# Altium PCB Processor Board.PcbDoc
Units mm, origin at the board's own origin, x right, y up, seen from the top; angles counter-clockwise.
Board outline 69.72 x 95.88 mm, 2 copper layers (Top Layer, Bottom Layer); 46 components, 39 nets, 179 pads, 1 vias.
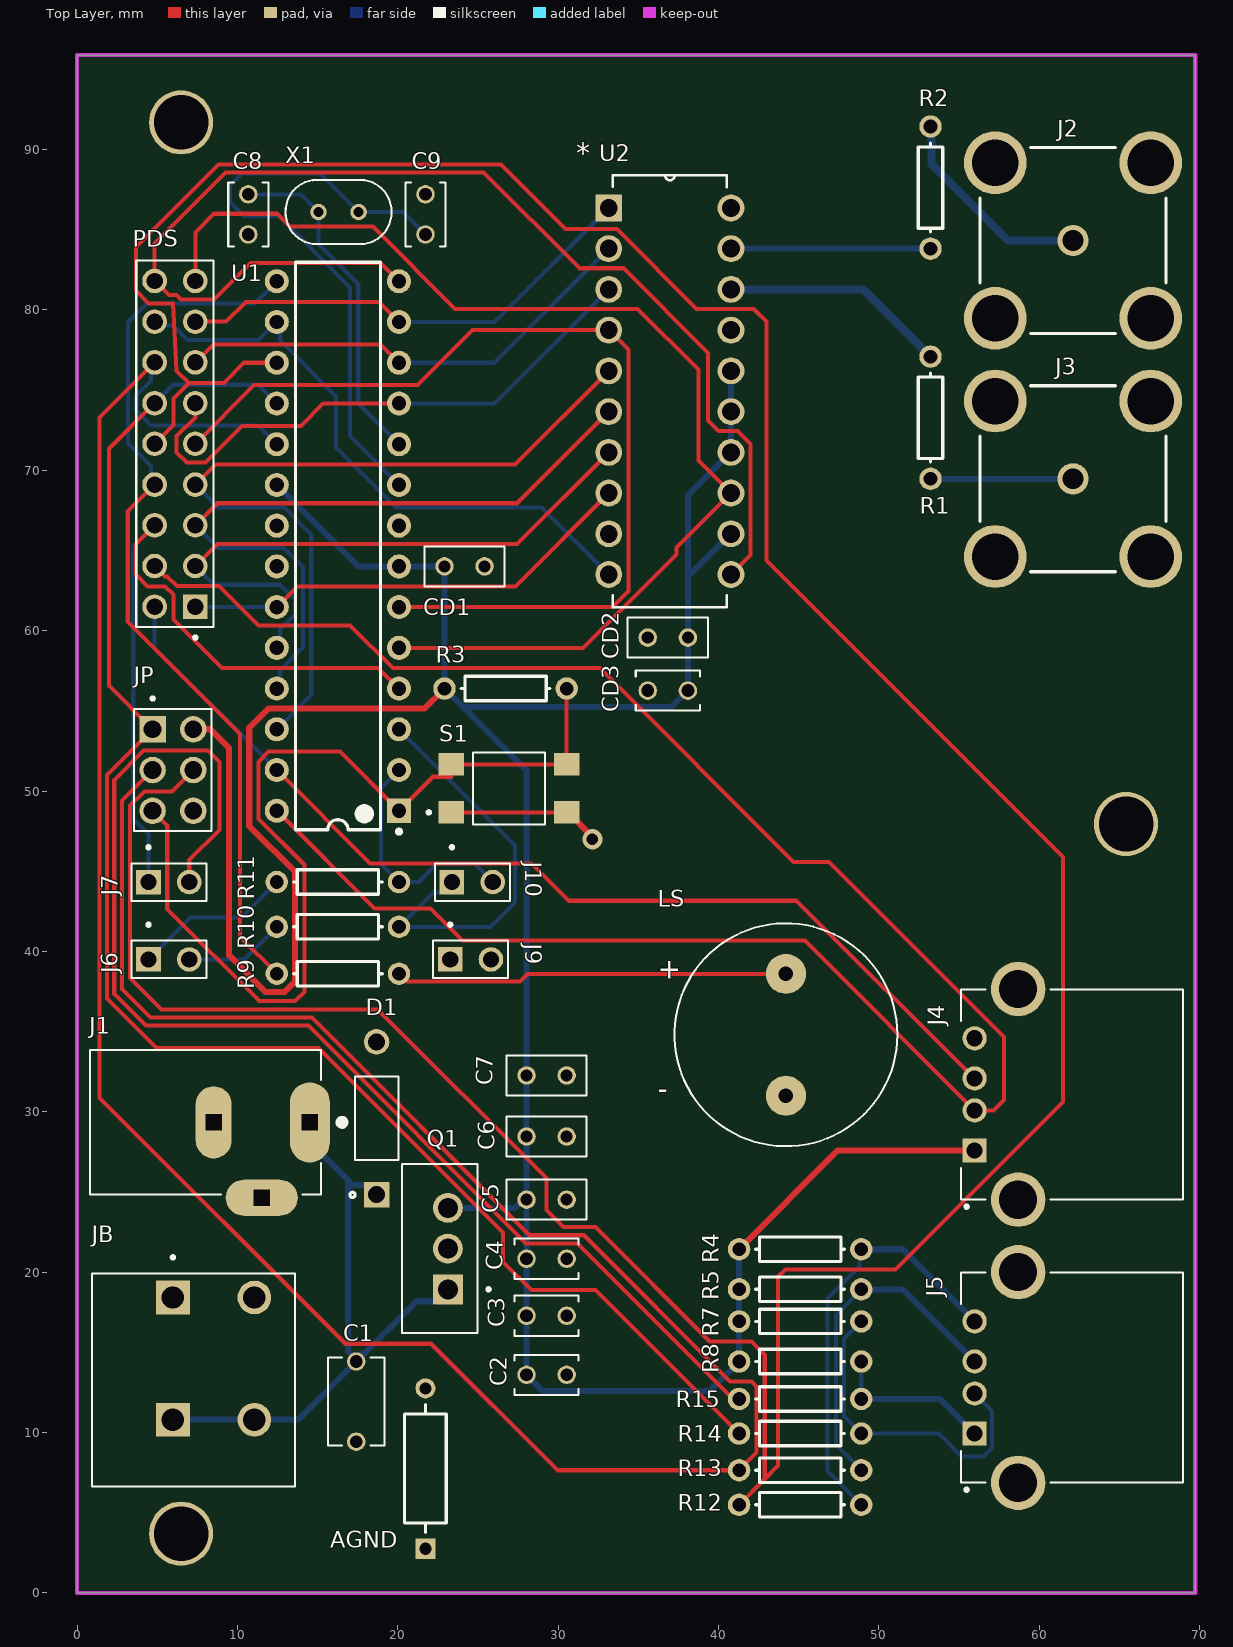
[diagram p0: Top Layer view]
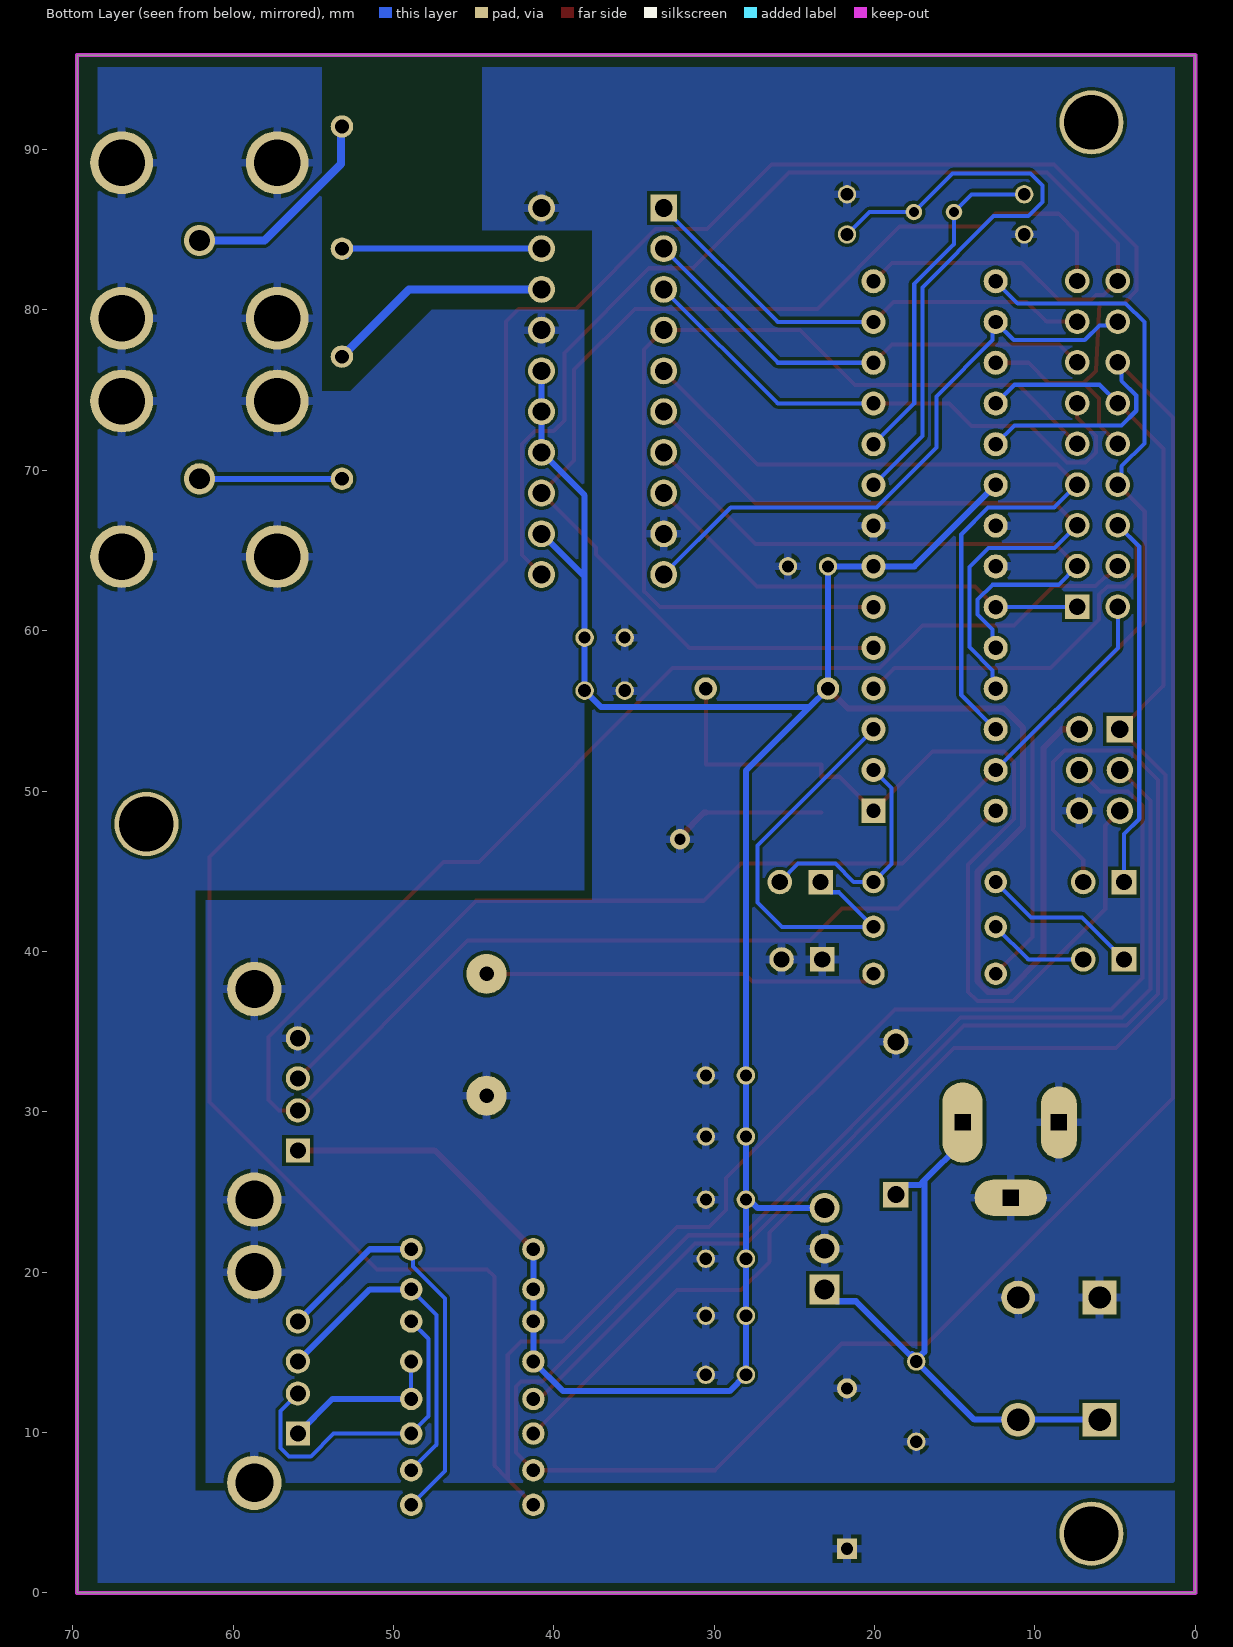
[diagram p1: Bottom Layer view, seen from below]

## Layer stack, top to bottom
Top Solder: solder mask 0.0102, Solder Resist, Dk 3.5
Top Layer: signal copper 0.0356
Dielectric 1: dielectric 0.32, FR-4, Dk 4.8
Bottom Layer: signal copper 0.0356
Bottom Solder: solder mask 0.0102, Solder Resist, Dk 3.5

## Board outline
0,0 69.723,0 69.723,95.885 0,95.885

## Design rules (kind name [scope] priority, off if disabled: settings)
BoardOutlineClearance [All] p1: gap=0.2 ignorepadtopadclearanceinfootprint=FALSE except(0.4: Arc-SplitBarrior Arc-SplitContinuation Track-SplitBarrior Track-SplitContinuation SMDPad-SplitBarrior SMDPad-SplitContinuation THPad-SplitBarrior THPad-SplitContinuation Via-SplitBarrior Via-SplitContinuation Fill-SplitBarrior Fill-SplitContinuation Poly-SplitBarrior Poly-SplitContinuation Region-SplitBarrior Region-SplitContinuation Text-SplitBarrior Text-SplitContinuation)
Clearance "Clearance Bottom Layer" [OnLayer('Bottom Layer')] p1: gap=0.203 ignorepadtopadclearanceinfootprint=TRUE except(0.254: Arc-Text Track-Text SMDPad-Text THPad-Text Via-Text Fill-Text Poly-Text Region-Text Text-Text)
Clearance "Clearance Top Layer" [OnLayer('Top Layer')] p2: gap=0.203 ignorepadtopadclearanceinfootprint=TRUE except(0.254: Arc-Text Track-Text SMDPad-Text THPad-Text Via-Text Fill-Text Poly-Text Region-Text Text-Text)
Clearance [All] p3: gap=0.2 ignorepadtopadclearanceinfootprint=FALSE except(0.089: Arc-Arc Arc-Track Arc-SMDPad Track-Track Track-SMDPad SMDPad-SMDPad; 0.127: Arc-Via Track-Via SMDPad-Via THPad-Via Via-Via; 0.254: Arc-Text Track-Text SMDPad-Text THPad-Text Via-Text Fill-Text Poly-Text Region-Text Text-Text)
HoleSize [All] p1: absolutevalues=TRUE maxlimit=6.3 minlimit=0.2 maxpercent=80.000 minpercent=20.000
MinimumAnnularRing [All] p1: minimumring=0.076
MinimumSolderMaskSliver [All] p1: minsoldermaskwidth=0.1
PolygonConnect PolygonConnect_1 [All] p1: thpad.connectstyle=Relief thpad.reliefconductorwidth=0.508 thpad.reliefentries=4 thpad.polygonreliefangle="90 Angle" thpad.airgapwidth=0.254 smdpad.connectstyle=Relief smdpad.reliefconductorwidth=0.508 smdpad.reliefentries=4 smdpad.polygonreliefangle="90 Angle" smdpad.airgapwidth=0.254 via.connectstyle=Direct via.reliefconductorwidth=0.508 via.reliefentries=4 via.polygonreliefangle="90 Angle" via.airgapwidth=0.254
RoutingCorners [All] p1: cornerstyle=Round minsetback=2.54 maxsetback=2.54
RoutingVias [All] p1: holewidth=0.5 width=1 viastyle="Through Hole" minholewidth=0.2 minwidth=0.45 maxholewidth=1 maxwidth=2
SilkToSilkClearance [All] p1: silktosilkclearance=0.1
SilkToSolderMaskClearance [IsPad] p1: minsilkscreentomaskgap=0.1 clearancetoexposedcopper=TRUE
SolderMaskExpansion [All] p1: expansion=0.102 istentingtop=FALSE
Width [All] p1: maxlimit=2.54 minlimit=0.089 preferedwidth=0.381
25 further rules are at their usual default settings.

## Components (designator, comment, footprint, x,y, rotation, side; value= is the part's Value field where it differs from the comment)
AGND "0 Ohm" FP-ZOR-25-R-52-0R-MFG 21.717,7.747 r90 top
C1 "10u" CAPRB500W50L550T350H600 17.399,11.923 r270 top
C2 "1u" CAPRB250W50L400T250H550 29.274,13.593 r0 top
C3 "1u" CAPRB250W50L400T250H550 29.274,17.276 r0 top
C4 "1u" CAPRB250W50L400T250H550 29.274,20.832 r0 top
C5 "0.1u" CAP_RDER71H104K0S1H03A 29.274,24.515 r0 top
C6 "0.1u" CAP_RDER71H104K0S1H03A 29.274,28.452 r0 top
C7 "0.1u" CAP_RDER71H104K0S1H03A 29.274,32.262 r0 top
C8 "22p" CAPRB250W50L400T250H550 10.668,85.959 r270 top
C9 "22p" CAPRB250W50L400T250H550 21.717,85.959 r90 top
CD1 "0.1u" CAP_RDER71H104K0S1H03A 24.154,64.008 r0 top
CD2 "0.1u" CAP_RDER71H104K0S1H03A 36.83,59.563 r180 top
CD3 "1u" CAPRB250W50L400T250H550 36.83,56.261 r180 top
D1 "1N4001-T" DIOAD953W69L521D272 18.669,29.591 r90 top
J1 "PJ-002AH" CUI_PJ-002AH 14.509,29.337 r180 top
J2 "BNC" SAMTEC_BNC7T-J-P-XX-RA-BH1 62.103,84.328 r270 top
J3 "BNC" SAMTEC_BNC7T-J-P-XX-RA-BH1 62.103,69.469 r270 top
J4 "UE27AC54100" AMPHENOL_UE27AC54100 55.964,31.081 r90 top
J5 "UE27AC54100" AMPHENOL_UE27AC54100 55.964,13.428 r90 top
J6 "5-146281-2" TE_5-146281-2 5.715,39.497 r0 top
J7 "5-146281-2" TE_5-146281-2 5.715,44.323 r0 top
J9 "5-146281-2" TE_5-146281-2 24.531,39.497 r0 top
J10 "5-146281-2" TE_5-146281-2 24.638,44.323 r0 top
JB "TBL004V-508-02BE-2GY" CUI_TBL004V-508-02BE-2GY 5.969,18.415 r0 top
JP "69192-406HLF" AMPHENOL_69192-406HLF 5.969,51.308 r270 top
LS "CPI-137-83T" XDCR_CPI-137-83T 44.196,34.798 r0 top
PDS "10129381-918001BLF" AMPHENOL_10129381-918001BLF 6.096,71.648 r90 top
Q1 "LM7805CT/NOPB" TO254P1054X470X1955-3 23.114,21.463 r90 top
R1 "Res1" AXIAL-0.3 53.213,73.279 r270 top value=100
R2 "Res1" AXIAL-0.3 53.213,87.63 r90 top value=100
R3 "Res1" AXIAL-0.3 26.714,56.388 r180 top value=1K
R4 "Res1" AXIAL-0.3 45.085,21.423 r180 top value=1K
R5 "Res1" AXIAL-0.3 45.085,18.923 r180 top value=1K
R7 "Res1" AXIAL-0.3 45.085,16.923 r180 top value=1K
R8 "Res1" AXIAL-0.3 45.085,14.423 r180 top value=1K
R9 "Res1" AXIAL-0.3 16.256,38.608 r0 top value=100
R10 "Res1" AXIAL-0.3 16.256,41.529 r0 top value=1K
R11 "Res1" AXIAL-0.3 16.256,44.323 r0 top value=1K
R12 "Res1" AXIAL-0.3 45.085,5.485 r0 top value=10K
R13 "Res1" AXIAL-0.3 45.085,7.644 r0 top value=10K
R14 "Res1" AXIAL-0.3 45.085,9.93 r0 top value=10K
R15 "Res1" AXIAL-0.3 45.085,12.089 r0 top value=10K
S1 "TL3305AF160QG" SW_TL3305AF160QG 26.924,50.165 r0 top
U1 "ATmega328-PU" 28P3 16.256,65.278 r180 top
U2 "AD7302BNZ" DIP254P762X533-20 40.767,63.5 r0 top
X1 "16 MHz" XTAL_ECS-160-20-46X 16.296,86.106 r0 top

## Footprints (in the part's own frame and the unit in brackets; to place one, negate y for a bottom-side part, rotate by r counter-clockwise, add the part's x,y. Pads: shape width x height; smd on the part's side, far side on the other; paste and mask are expansions set on the pad)
28P3 [mm] "28-Pin Plastic Dual In-Line Package (PDIP)"
  rect 1.5x1.5 hole 0.9: 1(-3.81,16.51)
  round 1.5 hole 0.9: 2(-3.81,13.97) 3(-3.81,11.43) 4(-3.81,8.89) 5(-3.81,6.35) 6(-3.81,3.81) 7(-3.81,1.27) 8(-3.81,-1.27) 9(-3.81,-3.81) 10(-3.81,-6.35) 11(-3.81,-8.89) 12(-3.81,-11.43) 13(-3.81,-13.97) 14(-3.81,-16.51) 15(3.81,-16.51) 16(3.81,-13.97) 17(3.81,-11.43) 18(3.81,-8.89) 19(3.81,-6.35) 20(3.81,-3.81) 21(3.81,-1.27) 22(3.81,1.27) 23(3.81,3.81) 24(3.81,6.35) 25(3.81,8.89) 26(3.81,11.43) 27(3.81,13.97) 28(3.81,16.51)
  silkscreen extent -3.94,-17.7 2.65,17.93, body extent -3.6,-17.65 3.6,17.65, height 4.58
AMPHENOL_69192-406HLF [mm]
  rect 1.65x1.65 / inner round 1.65 / far side rect 1.65x1.65 hole 1.1: 01(-2.54,-1.27)
  round 1.65 hole 1.1: 02(0,-1.27) 03(2.54,-1.27) 04(-2.54,1.27) 05(0,1.27) 06(2.54,1.27)
  silkscreen extent -4.56,-2.41 3.81,2.41, body extent -3.81,-2.41 3.81,2.41, height 8.38
AMPHENOL_10129381-918001BLF [mm]
  rect 1.53x1.53 hole 1.02: 01(-10.16,-1.27)
  round 1.53 hole 1.02: 02(-10.16,1.27) 03(-7.62,-1.27) 04(-7.62,1.27) 05(-5.08,-1.27) 06(-5.08,1.27) 07(-2.54,-1.27) 08(-2.54,1.27) 09(0,-1.27) 10(0,1.27) 11(2.54,-1.27) 12(2.54,1.27) 13(5.08,-1.27) 14(5.08,1.27) 15(7.62,-1.27) 16(7.62,1.27) 17(10.16,-1.27) 18(10.16,1.27)
  silkscreen extent -12.18,-2.41 11.43,2.41, body extent -22.86,-2.41 22.86,2.41, height 8.59
AMPHENOL_UE27AC54100 [mm]
  rect 1.508x1.508 hole 1: 1(-3.5,0)
  round 1.508 hole 1: 2(-1,0) 3(1,0) 4(3.5,0)
  round 3.396 hole 2.38: S1(-6.57,-2.71) S2(6.57,-2.71)
  silkscreen extent -7.1,-12.99 6.55,0.86
AXIAL-0.3 [mm] "Axial Device, Thru-Hole; 2 Leads; 0.3 in Pin Spacing"
  round 1.4 hole 0.85: 1(-3.81,0) 2(3.81,0)
  silkscreen extent -2.77,-0.76 2.77,0.76
CAP_RDER71H104K0S1H03A [mm]
  round 1.15 hole 0.75: 1(-1.25,0) 2(1.25,0)
  silkscreen extent -2.5,-1.25 2.5,1.25
CAPRB250W50L400T250H550 [mm]
  round 1.15 hole 0.8: 1(-1.25,0) 2(1.25,0)
  silkscreen extent -2,-1.25 2,1.25
CAPRB500W50L550T350H600 [mm]
  round 1.15 hole 0.8: 1(-2.5,0) 2(2.5,0)
  silkscreen extent -2.75,-1.75 2.75,1.75, body extent -2.75,-1.75 2.75,1.75, height 3
CUI_PJ-002AH [mm]
  oval 2.5x5 hole 1 square: 1(0,0)
  oval 2.25x4.5 hole 1 square: 2(6,0)
  oval 4.5x2.25 hole 1 square: 3(3,4.7)
  silkscreen extent -2.2,-4.5 13.7,4.5
CUI_TBL004V-508-02BE-2GY [mm]
  rect 2.1x2.1 hole 1.4: 1_A(0,0) 1_B(0,-7.62)
  round 2.1 hole 1.4: 2_A(5.08,0) 2_B(5.08,-7.62)
  silkscreen extent -5.04,-11.8 7.62,2.6
DIOAD953W69L521D272 [mm]
  round 1.59 hole 1.06: A(4.765,0)
  rect 1.59x1.59 hole 1.06: C(-4.765,0)
  silkscreen extent -4.93,-1.36 2.6,1.66
DIP254P762X533-20 [mil]
  rect 66x66 / inner round 66 / far side rect 66x66 hole 44: 1(-300,900)
  round 66 hole 44: 2(-300,800) 3(-300,700) 4(-300,600) 5(-300,500) 6(-300,400) 7(-300,300) 8(-300,200) 9(-300,100) 10(-300,0) 11(0,0) 12(0,100) 13(0,200) 14(0,300) 15(0,400) 16(0,500) 17(0,600) 18(0,700) 19(0,800) 20(0,900)
  silkscreen extent -290,-80 -10,980
FP-ZOR-25-R-52-0R-MFG [mm]
  rect 1.25x1.25 hole 0.75 paste-1000 mask+0: 1(-5,0)
  round 1.25 hole 0.75 paste-1000 mask+0: 2(5,0)
  silkscreen extent -3.98,-1.3 3.97,1.3, body extent -5.72,-1.4 5.72,1.4, height 0.25
SAMTEC_BNC7T-J-P-XX-RA-BH1 [mm]
  round 1.95 hole 1.3: 1(0,0)
  round 3.916 hole 2.9: S1(-4.85,4.85) S2(4.85,4.85) S3(4.85,-4.85) S4(-4.85,-4.85)
  silkscreen extent -5.8,-5.8 5.8,5.8
SW_TL3305AF160QG [mm]
  rect 1.6x1.4 smd: 1(-3.6,-1.5) 2(3.6,-1.5) 3(-3.6,1.5) 4(3.6,1.5)
  silkscreen extent -5.1,-2.25 2.25,2.25, body extent -3.75,-3.7 3.75,0.1, height 2.25
TE_5-146281-2 [mm]
  rect 1.53x1.53 hole 1.02: 1(-1.27,0)
  round 1.53 hole 1.02: 2(1.27,0)
  silkscreen extent -2.34,-1.17 2.34,2.27
TO254P1054X470X1955-3 [mm]
  rect 1.86x1.86 hole 1.24: 1(-2.54,0)
  round 1.86 hole 1.24: 2(0,0) 3(2.54,0)
  silkscreen extent -5.27,-2.64 5.27,2.86
XDCR_CPI-137-83T [mm]
  round 2.5 hole 0.9: N(0,-3.8) P(0,3.8)
  silkscreen extent -6.95,-6.95 6.95,6.95
XTAL_ECS-160-20-46X [mm]
  round 1.03 hole 0.63: 1(-1.25,0) 2(1.25,0)
  silkscreen extent -3.3,-2 3.3,2, body extent -3.4,-2 3.4,2, height 1.8

## Part data
AGND: library part CMP-03413-000010-1, "RES 0 OHM JUMPER 1/4W AXIAL", Case/Package=Axial, Max Operating Temperature=155°C, Max Power Dissipation=250mW, Min Operating Temperature=-55°C, Package Quantity=5000, Resistance=0mR, Resistor Type="Carbon Film", Temperature Coefficient=100ppm/°C, Tolerance=5%, Construction=Cylindrical, Lead Free="Lead Free", Length=0.248inch, Military Standard=Not, Number of Terminations=2, Packaging="Tape and Reel", Power Rating=250mW, RoHS Compliant=Yes, Series=ZOR, Termination=Axial
C1: library part FA26X7R1E106KRU00, "10 ÂµF Â±10% 25V Ceramic Capacitor X7R Radial", Package="Radial TDK", Check_prices=https://www.snapeda.com/parts/FA26X7R1E106KRU00/TDK/view-part/?ref=eda, MF=TDK, MP=FA26X7R1E106KRU00, Purchase-URL=https://pricing.snapeda.com/search/part/FA26X7R1E106KRU00/?ref=eda, SnapEDA_Link=https://www.snapeda.com/parts/FA26X7R1E106KRU00/TDK/view-part/?ref=snap
C2 C3 C4 CD3: library part FA18X7R1E105KRU06, "1 ÂµF Â±10% 25V Ceramic Capacitor X7R Radial", Package="Radial TDK Corporation", Check_prices=https://www.snapeda.com/parts/FA18X7R1E105KRU06/TDK/view-part/?ref=eda, MF=TDK, MP=FA18X7R1E105KRU06, Purchase-URL=https://pricing.snapeda.com/search/part/FA18X7R1E105KRU06/?ref=eda, SnapEDA_Link=https://www.snapeda.com/parts/FA18X7R1E105KRU06/TDK/view-part/?ref=snap
C5 C6 C7 CD1 CD2: library part RDER71H104K0S1H03A, "Lead capacitor X7R(EIA) with Capacitance 0.10F, Rated Voltage 50Vdc", Package=NONSTANDARD, Availability=Good, BuyPart=https://www.snapeda.com/parts/RDER71H104K0S1H03A/Murata/view-part/1758922/?ref=eda, DigiKey-Purchase-URL=https://snapeda.com/shop?store=DigiKey&id=1758922, MF=Murata, Mouser-Purchase-URL=https://snapeda.com/shop?store=Mouser&id=1758922, MP=RDER71H104K0S1H03A, Price=None, SnapEDA_Link=https://www.snapeda.com/parts/RDER71H104K0S1H03A/Murata/view-part/1758922/?ref=snap
C8 C9: library part FG18C0G2A220JNT06, "Cap Ceramic 22pF 100V C0G 5% Radial 2.5mm 125Â°C Ammo", Package="Radial TDK Corporation", Check_prices=https://www.snapeda.com/parts/FG18C0G2A220JNT06/TDK/view-part/?ref=eda, Digi-Key_Part_Number=445-173230-1-ND, MF=TDK, MP=FG18C0G2A220JNT06, Purchase-URL=https://pricing.snapeda.com/search/part/FG18C0G2A220JNT06/?ref=eda, SnapEDA_Link=https://www.snapeda.com/parts/FG18C0G2A220JNT06/TDK/view-part/?ref=snap
D1: "Diode, Standard Recovery, 1a, 50v, Do-204al-2, Full Reel", Package=None, Availability=Unavailable, MP=1N4001-T, Price=None
J1: "2.0 x 6.5 mm, 5.0 A, Horizontal, Through Hole, Dc Power Jack Connector", Package=None, Availability="In Stock", Check_prices=https://www.snapeda.com/parts/PJ-002AH/CUI+Devices/view-part/?ref=eda, CUI_purchase_URL=https://www.cuidevices.com/product/interconnect/connectors/dc-power-connectors/jacks/pj-002ah?utm_source=snapeda.com&utm_medium=referral&utm_campaign=snapedaBOM, MF="CUI Devices", MP=PJ-002AH, Price=None, Purchase-URL=https://pricing.snapeda.com/search/part/PJ-002AH/?ref=eda, SnapEDA_Link=https://www.snapeda.com/parts/PJ-002AH/CUI+Devices/view-part/?ref=snap
J2 J3: library part BNC7T-J-P-XX-RA-BH1, "BNC Connector Jack, Female Socket 75Ohm Panel Mount, Through Hole, Right Angle Solder", Package=None, Availability=Unavailable, DigiKey-Purchase-URL=https://snapeda.com/shop?store=DigiKey&id=608953, MF=Samtec, Mouser-Purchase-URL=https://snapeda.com/shop?store=Mouser&id=608953, MP=BNC7T-J-P-HN-RA-BH1, Price=None, SnapEDA_Link=https://www.snapeda.com/parts/BNC7T-J-P-HN-RA-BH1/Samtec%20Inc./view-part/608953/?ref=snap, Toby_UK-Purchase-URL=https://snapeda.com/shop?store=Toby+UK&id=608953
J4 J5: "USB-A _USB TYPE-A_ USB 2.0 Receptacle Connector 4 Position Through Hole, Right Angle", Package=None, Digi-Key_Part_Number=UE27AC54100-ND, Digi-Key_Purchase_URL=https://www.digikey.com/product-detail/en/amphenol-icc-commercial-products/UE27AC54100/UE27AC54100-ND/1972253?utm_source=snapeda&utm_medium=aggregator&utm_campaign=symbol, MF="Amphenol ICC _Commercial Products_", MP=UE27AC54100, SnapEDA_Link=https://www.snapeda.com/parts/UE27AC54100/Amphenol%20Commercial%20Products/view-part/4701388/?ref=snap
J6 J7 J9 J10: "Header; Breakaway; 0.100 in.; PC Board; Single; 2; 0.025 in.; 0.12 in.; 3 A", Package=None, Availability=Unavailable, Centerline_Pitch="2.54 mm[.1 in]", EU_RoHS_Compliance=Compliant, MF="TE Connectivity", MP=5-146281-2, Number_of_Positions=2, Price=None, Product_Type=Connector, SnapEDA_Link=https://www.snapeda.com/parts/5-146281-2/TE%20Connectivity%20AMP%20Connectors/view-part/457165/?ref=snap
JB: "2~24 Poles, Screwless, Vertical, 5.08 Pitch, 24~14 (AWG), Terminal Block Connector", Package=None, Arrow_Electronics-Purchase-URL=https://snapeda.com/shop?store=Arrow+Electronics&id=3647771, CUI_purchase_URL=https://www.cuidevices.com/product/interconnect/connectors/terminal-blocks/tbl004v-508-series?utm_source=snapeda.com&utm_medium=referral&utm_campaign=snapedaBOM, DigiKey-Purchase-URL=https://snapeda.com/shop?store=DigiKey&id=3647771, MF="CUI Devices", Mouser-Purchase-URL=https://snapeda.com/shop?store=Mouser&id=3647771, MP=TBL004V-508-02BE-2GY, SnapEDA_Link=https://www.snapeda.com/parts/TBL004V-508-02BE-2GY/CUI%20Devices/view-part/3647771/?ref=snap
JP: "BergStikÂ®, Board to Board connector, Unshrouded vertical header, Through Hole, Double Row, 06 Positions, 2.54 mm (0.100in) Pitch.", Package=None, Check_prices=https://www.snapeda.com/parts/69192-406HLF/Amphenol/view-part/?ref=eda, Digi-Key_Part_Number=609-4711-ND, MF="AMPHENOL ICC / FCI", MP=69192-406HLF, Purchase-URL=https://pricing.snapeda.com/search/part/69192-406HLF/?ref=eda, SnapEDA_Link=https://www.snapeda.com/parts/69192-406HLF/Amphenol/view-part/?ref=snap
LS: "13.9 mm, 5 Vdc, 83 dB, Through Hole, Driving Circuit, Piezo Audio Indicator Buzzer", Package="CUI Devices", CUI_purchase_URL=https://www.cuidevices.com/product/audio/buzzers/audio-indicators/cpi-137-83t?utm_source=snapeda.com&utm_medium=referral&utm_campaign=snapedaBOM, Digi-Key_Part_Number=2223-CPI-137-83T-ND, Digi-Key_Purchase_URL=https://www.digikey.com/product-detail/en/cui-devices/CPI-137-83T/2223-CPI-137-83T-ND/11480414?utm_source=snapeda&utm_medium=aggregator&utm_campaign=symbol, MF="CUI Devices", MP=CPI-137-83T, SnapEDA_Link=https://www.snapeda.com/parts/CPI-137-83T/CUI%20Devices/view-part/4502141/?ref=snap
PDS: "EconoStikâ„¢, Board to Board connector, Unshrouded Vertical Header, Through Hole, Double Row, 18 Positions, 2.54 mm (0.100in) Pitch.", Package=None, Availability="In Stock", Check_prices=https://www.snapeda.com/parts/10129381-918001BLF/Amphenol+FCI/view-part/?ref=eda, MF="Amphenol ICC (FCI)", MP=10129381-918001BLF, Price=None, Purchase-URL=https://pricing.snapeda.com/search/part/10129381-918001BLF/?ref=eda, SnapEDA_Link=https://www.snapeda.com/parts/10129381-918001BLF/Amphenol+FCI/view-part/?ref=snap
Q1: Package=None, Availability=Unavailable, MP=LM7805CT/NOPB, Price=None
R1 R2 R3 R4 R5 R7 R8 R9 R10 R11 R12 R13 R14 R15: "Resistor", LatestRevisionDate=17-Jul-2002, LatestRevisionNote="Re-released for DXP Platform.", PackageDescription="Axial Device, Thru-Hole; 2 Leads; 0.3 in Pin Spacing", PackageReference=AXIAL-0.3, Published=8-Jun-2000, Publisher="Altium Limited"
S1: "Tactile Switch SPST-NO Top Actuated Surface Mount", Package=None, Availability="In Stock", Check_prices=https://www.snapeda.com/parts/TL3305AF160QG/E-Switch/view-part/?ref=eda, MF=E-Switch, MP=TL3305AF160QG, Price=None, Purchase-URL=https://pricing.snapeda.com/search/part/TL3305AF160QG/?ref=eda, SnapEDA_Link=https://www.snapeda.com/parts/TL3305AF160QG/E-Switch/view-part/?ref=snap
U1: library part CMP-0095-00015-2, "8-bit AVR Microcontroller, 32KB Flash, 1KB EEPROM, 2KB SRAM, 28-pin PDIP, Industrial Grade (-40°C to 85°C)", ComponentLink1Description="Manufacturer URL", ComponentLink1URL=http://www.atmel.com/, ComponentLink2Description="ATmega48A/48PA/88A/88PA/168A/168PA/328/328P Datasheet", ComponentLink2URL=http://www.atmel.com/dyn/resources/prod_documents/8271.pdf, ComponentLink3Description="ATmega48A/48PA/88A/88PA/168A/168PA/328/328P Summary", ComponentLink3URL=http://www.atmel.com/dyn/resources/prod_documents/8271S.pdf, DatasheetVersion="revD, May-2011", PackageDescription="28-lead (0.300\"/7.62mm Wide) Plastic Dual Inline Package (PDIP)", PackageReference=28P3, PackageVersion="revB, Sep-2001", RevisionNote="DatasheetVersion updated. URLs added."
U2: "2.7 V to 5.5 V, Parallel Input Dual Voltage Output 8-Bit DAC", Package="PDIP-20 Analog Devices", Availability="In Stock", Check_prices=https://www.snapeda.com/parts/AD7302BNZ/Analog+Devices+Inc./view-part/?ref=eda, MF="Analog Devices", MP=AD7302BNZ, Price=None, Purchase-URL=https://pricing.snapeda.com/search/part/AD7302BNZ/?ref=eda, SnapEDA_Link=https://www.snapeda.com/parts/AD7302BNZ/Analog+Devices+Inc./view-part/?ref=snap
X1: library part ECS-160-20-46X, "16 MHz Â±30ppm Crystal 20pF 50 Ohms HC-46/X", Package="HC46/X ECS International", Availability="In Stock", Check_prices=https://www.snapeda.com/parts/ECS-160-20-46X/ECS+Inc./view-part/?ref=eda, MF="ECS Inc.", MP=ECS-160-20-46X, Price=None, Purchase-URL=https://pricing.snapeda.com/search/part/ECS-160-20-46X/?ref=eda, SnapEDA_Link=https://www.snapeda.com/parts/ECS-160-20-46X/ECS+Inc./view-part/?ref=snap

## Free pads (board coordinates)
  round 4 hole 3.4: 5(6.477,91.694) 6(6.477,3.683) MOUNT(65.405,47.942)

## Via types
v1: diameter 1.27, hole 0.711, Top Layer to Bottom Layer, 1 vias

## Nets (pads, with @x,y where several pads share a name; then routed paths per layer and width w, separated by ;. In a path a pad name is that pad's centre, name@x,y a point inside that pad or via, vN(x,y) a via of type N, cw(c..) or ccw(c..) an arc to the next point about the centre after c; other vN are vias at no path point)
+5: C2.1 C3.1 C4.1 C5.1 C6.1 C7.1 CD1.1 CD2.1 CD3.1 J4.1 JP.04 Q1.3 R3.2 R4.2 R5.2 R7.2 R8.2 U1.7 U1.20 U2.12 U2.14 U2.15 U2.16 | length 199.4
  Top Layer w0.381: JP.04 8.306,53.848 9.474,52.68 9.474,39.751 11.762,37.463 12.92,37.463 13.591,38.134 13.591,44.956 10.731,47.816 10.731,53.946 11.923,55.137 21.653,55.137 R3.2 ; R4.2 47.437,27.585 55.96,27.585 J4.1
  Bottom Layer w0.381: U1.20 17.526,64.008 U1.7 CD1.1 R3.2 24.05,55.241 ; Q1.3 27.304,24.003 27.816,24.515 C5.1 ; U2.12 38.08,63.353 ; U2.16 U2.15 U2.14 38.08,68.433 38.08,63.353 ; R4.2 R5.2 R7.2 R8.2 39.426,12.574 29.044,12.574 C2.1 C3.1 C4.1 C5.1 ; 24.05,55.241 28.024,51.268 C7.1 C6.1 C5.1 ; 24.05,55.241 37.06,55.241 CD3.1 CD2.1 38.08,63.353
+12: C1.1 D1.C J1.1 JB.1_B JB.2_B Q1.1 | length 39.3
  Bottom Layer w0.381: JB.1_B JB.2_B 13.771,10.795 C1.1 ; J1.1 14.509,28.097 16.891,25.715 ; C1.1@17.653,14.885 17.399,14.631 C1.1 ; D1.C 18.065,25.43 17.176,25.43 16.891,25.715 ; Q1.1 22.374,18.183 21.16,18.183 C1.1 ; 16.891,25.715 16.891,15.031 17.399,14.523 C1.1
AGND: AGND.1 J2.S1 J2.S2 J2.S3 J2.S4 J3.S1 J3.S2 J3.S3 J3.S4 U2.17
BEEPER: PDS.08 R9.1 U1.15 | length 56.2
  Top Layer w0.254: PDS.08 3.15,67.432 3.15,60.558 10.16,53.547 10.16,40.894 R9.1
  Bottom Layer w0.254: PDS.08 4.599,69.335 4.599,70.254 3.172,71.681 3.172,79.235 4.351,80.414 11.072,80.414 U1.15
CMS: JP.05 PDS.10 R12.1 U1.17 | length 234.5
  Top Layer w0.254: PDS.10 5.994,72.816 5.994,74.473 6.96,75.438 ; JP.05 5.905,49.974 4.191,49.974 3.299,49.082 3.299,38.351 5.266,36.384 18.734,36.384 29.261,25.857 29.261,23.876 30.328,22.809 32.309,22.809 39.446,15.672 42.037,15.672 42.875,14.834 42.875,7.085 ; U1.17 10.414,76.708 9.144,75.438 6.96,75.438 ; R12.1 42.875,7.085 ; 6.96,75.438 6.198,76.2 5.969,80.414 4.445,80.414 3.658,81.201 3.658,83.922 8.814,89.078 26.416,89.078 30.455,85.039 33.652,85.039 38.63,80.061 42.189,80.061 42.977,79.273 42.977,64.389 61.468,45.898 61.468,30.607 51.029,20.168 44.171,20.168 43.713,19.71 43.713,7.923 42.875,7.085
DB0: PDS.01 U1.23 U2.8 | length 28.7
  Top Layer w0.254: U1.23 13.741,62.763 27.33,62.763 U2.8
  Bottom Layer w0.254: PDS.01 7.386,61.468 U1.23
DB1: PDS.03 U1.24 U2.7 | length 39.3
  Top Layer w0.254: PDS.03 8.743,65.405 27.432,65.405 U2.7
  Bottom Layer w0.254: PDS.03 8.534,62.86 12.653,62.86 13.577,61.936 13.577,61 12.636,60.059 12.636,59.118 U1.24
DB2: PDS.05 U1.25 U2.6 | length 44.8
  Top Layer w0.254: PDS.05 8.743,67.945 27.432,67.945 U2.6
  Bottom Layer w0.254: PDS.05 8.788,65.146 12.907,65.146 14.085,63.968 14.085,58.968 12.636,57.519 12.636,56.578 U1.25
DB3: PDS.07 U1.26 U2.5 | length 50.3
  Top Layer w0.254: PDS.07 8.616,70.358 27.305,70.358 U2.5
  Bottom Layer w0.254: PDS.07 8.795,67.679 12.914,67.679 14.593,66 14.593,55.995 U1.26
DB4: PDS.09 U1.6 U2.4 | length 60.2
  Top Layer w0.254: PDS.09 11.029,75.311 21.209,75.311 24.638,78.74 U2.4 34.366,77.521 34.366,62.459 33.376,61.468 U1.6
DB5: PDS.11 U1.11 U2.3 | length 35.2
  Top Layer w0.254: PDS.11 7.366,73.304 6.198,72.136 6.198,71.12 6.833,70.485 8.001,70.485 10.287,72.771 13.945,72.771 15.342,74.168 U1.11
  Bottom Layer w0.254: U1.11 26.035,74.168 U2.3
DB6: PDS.13 U1.12 U2.2 | length 29.7
  Top Layer w0.254: PDS.13 8.489,77.851 18.923,77.851 U1.12
  Bottom Layer w0.254: U1.12 26.035,76.708 U2.2
DB7: PDS.15 U1.13 U2.1 | length 29.7
  Top Layer w0.254: PDS.15 9.291,79.268 10.516,80.493 18.821,80.493 U1.13
  Bottom Layer w0.254: U1.13 26.035,79.248 U2.1
GND: AGND.2 C1.2 C2.2 C3.2 C4.2 C5.2 C6.2 C7.2 C8.2 C9.2 CD1.2 CD2.2 CD3.2 D1.A J1.2 J1.3 J4.4 J4.S1 J4.S2 J5.S1 J5.S2 J9.1 J9.2 JB.1_A JB.2_A JP.06 LS.N Q1.2 S1.1 S1.2 U1.8 U1.21 U1.22 U2.9 U2.20 | length 9.6
  Top Layer w0.254: S1.1 S1.2
  Top Layer w0.381: S1.2 30.624,48.665 32.131,47.158 v1(32.131,46.99)
Launch: J7.1 PDS.06 U1.4 | length 47
  Top Layer w0.254: PDS.06 3.658,65.4 3.658,63.5 4.394,62.763 5.486,62.763 5.994,62.255 5.994,60.706 9.017,57.683 18.771,57.683 U1.4
  Bottom Layer w0.254: J7.1 4.445,47.316 3.493,48.268 3.493,65.235 PDS.06
nAB: PDS.18 U1.14 U2.11 | length 76.6
  Top Layer w0.254: U1.14 18.923,82.931 10.82,82.931 8.534,80.645 6.48,80.645 6.203,80.922 5.712,80.922 PDS.18 4.826,84.15 9.246,88.57 25.342,88.57 31.311,82.601 34.061,82.601 39.348,77.314 39.348,73.097 40.005,72.441 41.173,72.441 41.986,71.628 41.986,64.719 U2.11
NetC8_1: C8.1 U1.10 X1.1 | length 21.4
  Bottom Layer w0.254: C8.1 13.943,87.209 X1.1 15.046,84.097 17.526,81.617 17.526,74.168 U1.10
NetC9_1: C9.1 U1.9 X1.2 | length 38.4
  Bottom Layer w0.254: U1.9 17.018,72.136 17.018,81.407 12.573,85.852 10.414,85.852 9.525,86.741 9.525,87.757 10.287,88.519 15.133,88.519 X1.2 20.32,86.106 C9.1
NetJ5_1: J5.1 R8.1 R15.2 | length 10.3
  Bottom Layer w0.254: R15.2 R8.1
  Bottom Layer w0.381: R15.2 53.803,12.089 J5.1
NetJ5_2: J5.2 R7.1 R14.2 | length 20.7
  Bottom Layer w0.254: R7.1 47.814,15.842 47.814,11.011 R14.2 53.737,9.93 55.158,8.509 56.52,8.509 57.048,9.037 57.048,11.344 J5.2
NetJ5_3: J5.3 R5.1 R13.2 | length 21.5
  Bottom Layer w0.254: R13.2 47.306,9.233 47.306,17.334 R5.1
  Bottom Layer w0.381: R5.1 51.469,18.923 J5.3
NetJ5_4: J5.4 R4.1 R12.2 | length 26.6
  Bottom Layer w0.254: R12.2 46.798,7.582 46.798,18.355 48.785,20.342 48.785,21.313 R4.1
  Bottom Layer w0.381: R4.1 51.469,21.423 J5.4
NetJ6_1: J6.1 R11.1 | length 10
  Bottom Layer w0.254: J6.1 7.067,42.119 10.242,42.119 R11.1
NetJ6_2: J6.2 R10.1 | length 6.3
  Bottom Layer w0.254: J6.2 10.414,39.497 R10.1
NetLS_P: LS.P R9.2 | length 24.5
  Top Layer w0.254: R9.2 20.549,38.125 27.61,38.125 28.082,38.598 LS.P
NetR1_1: R1.1 U2.18 | length 14.2
  Bottom Layer w0.508: U2.18 49.022,81.28 R1.1
NetR2_1: R2.1 U2.19 | length 13.1
  Bottom Layer w0.254: R2.1@52.903,83.312 R2.1@53.213,83.312
  Bottom Layer w0.381: U2.19 R2.1
  Bottom Layer w0.508: U2.19 U2.19@40.991,83.596
nLDAC: PDS.17 U1.5 U2.13 | length 72.4
  Top Layer w0.254: PDS.17 7.366,84.836 8.53,86 12.45,86 13.259,85.192 18.44,85.192 23.571,80.061 34.95,80.061 38.735,76.276 38.735,70.612 U2.13 37.363,65.176 37.363,64.737 31.554,58.928 U1.5
nRST: JP.03 R3.1 S1.3 S1.4 U1.1 | length 60.6
  Top Layer w0.254: JP.03 5.613,47.854 5.613,42.632 11.354,36.892 13.589,36.892 14.162,37.465 14.162,45.401 11.303,48.26 11.303,51.816 11.938,52.451 16.383,52.451 U1.1 22.188,50.89 23.324,50.89 S1.3 S1.4 R3.1
nWR: PDS.16 U1.16 U2.10 | length 38.2
  Bottom Layer w0.254: PDS.16 5.053,79.041 5.972,79.041 6.891,78.122 11.32,78.122 U1.16 12.636,79.057 12.636,78.117 16.141,74.612 16.141,71.414 19.875,67.679 28.968,67.679 U2.10
OUTA: J2.1 R2.2 | length 12.7
  Bottom Layer w0.254: R2.2@53.213,90.932 R2.2@53.272,90.873
  Bottom Layer w0.508: R2.2@53.272,90.873 53.272,89.095 58.039,84.328 J2.1
OUTB: J3.1 R1.2 | length 8.9
  Bottom Layer w0.381: R1.2 J3.1
PDOWN: JP.02 PDS.14 R13.1 U1.19 | length 179.9
  Top Layer w0.254: JP.02 2.791,49.4 2.791,37.653 4.568,35.876 14.632,35.876 28.212,22.296 31.603,22.296 40.716,13.183 42.037,13.183 42.367,12.852 42.367,8.736 R13.1 29.948,7.644 22.061,15.531 16.727,15.531 1.397,30.861 1.397,73.299 PDS.14
  Bottom Layer w0.254: PDS.14 4.599,76.501 4.599,75.582 3.68,74.663 3.68,73.713 4.599,72.794 11.28,72.794 U1.19
pLAUNCH: J7.2 R15.1 | length 78.6
  Top Layer w0.254: J7.2 6.985,45.695 8.865,47.574 8.865,51.816 8.153,52.527 4.14,52.527 2.311,50.698 2.311,37.338 4.281,35.368 14.416,35.368 27.996,21.788 31.196,21.788 40.615,12.37 R15.1
PUP: JP.01 PDS.12 R14.1 U1.18 | length 100.9
  Top Layer w0.254: PDS.12 1.981,71.343 1.981,56.566 JP.01 1.854,51.003 1.854,37.074 4.947,33.981 15.041,33.981 26.543,22.479 26.543,20.65 26.617,20.576 28.321,18.872 32.333,18.872 R14.1
  Bottom Layer w0.254: PDS.12 5.972,75.334 11.28,75.334 U1.18
RXRWRF: J10.2 R11.2 U1.2 | length 14.7
  Bottom Layer w0.254: U1.2 18.935,50.177 18.935,45.454 R11.2 21.299,44.323 22.445,45.469 24.762,45.469 J10.2
STICKX: J4.3 PDS.02 U1.27 | length 64.8
  Top Layer w0.254: U1.27 18.263,45.491 28.321,45.491 30.658,43.155 44.856,43.155 J4.3@55.947,32.064
  Bottom Layer w0.254: PDS.02 4.826,58.928 U1.27
STICKY: J4.2 PDS.04 U1.28 | length 122.4
  Top Layer w0.254: PDS.04 5.475,63.379 5.612,63.379 6.218,62.773 8.855,62.773 11.303,60.325 17.018,60.325 19.685,57.658 32.588,57.658 44.679,45.568 46.888,45.568 57.785,34.671 57.785,30.734 57.132,30.081 J4.2 45.38,40.665 24.028,40.665 22.022,42.672 18.542,42.672 U1.28
TXRWRR: J10.1 R10.2 U1.3 | length 26.1
  Bottom Layer w0.254: U1.3 27.305,46.609 27.305,43.053 25.781,41.529 R10.2 22.222,43.685 22.73,43.685 J10.1

## Polygon pours and split planes (outlines as drawn)
AGND on Bottom Layer "AGND_L02_P000" (solid, pour order 0): 47.625,80.01 52.705,74.93 54.483,74.93 54.483,95.123 68.453,95.123 68.453,0.635 1.27,0.635 1.27,6.35 62.357,6.35 62.357,43.815 38.1,43.815 38.1,80.01
GND on Bottom Layer "GND_L02_P001" (solid, remove dead copper, pour order 1): 61.722,43.18 37.592,43.18 37.592,76.327 37.592,84.963 44.45,84.963 44.45,95.123 44.436,95.137 1.28,95.137 1.271,6.858 61.722,6.858

## Keep-outs
Keep-Out Layer:
  the board outline again, w0.254

## Text inside footprints (layer, text, board x,y; h text height)
J2: Top 3D Body "PCB Edge" at 68.253,76.828 h1.27 r270
J3: Top 3D Body "PCB Edge" at 68.253,61.969 h1.27 r270
LS: Top 3D Body "-" at 36.196,30.798 h1.27; Top 3D Body "+" at 36.196,38.298 h1.27; Top Overlay "-" at 36.196,30.798 h1.27; Top Overlay "+" at 36.196,38.298 h1.27
U2: Top 3D Body "*" at 32.553,87.505 h1.27; Top Overlay "*" at 31.115,89.154 h1.27